# EAGLE board SaLAltimeter (EAGLE 7.5.0)
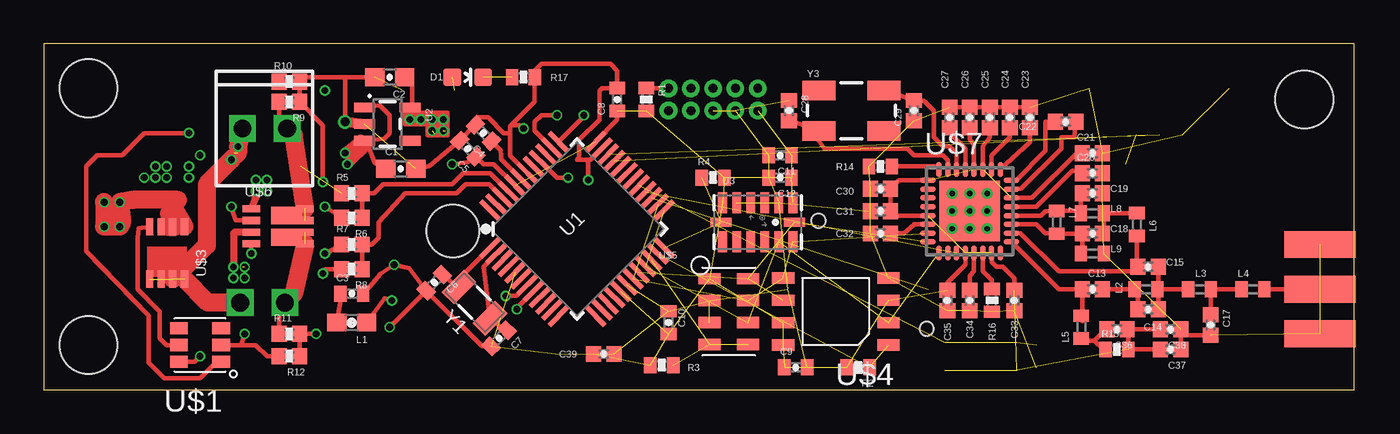
[diagram p0: board, top side]
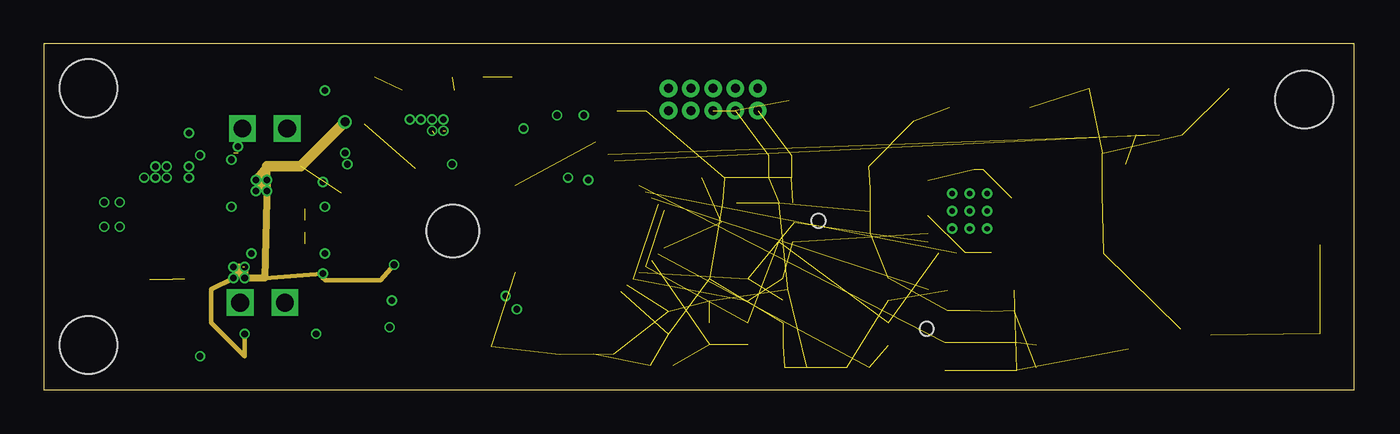
[diagram p1: board, inner layer Route2]
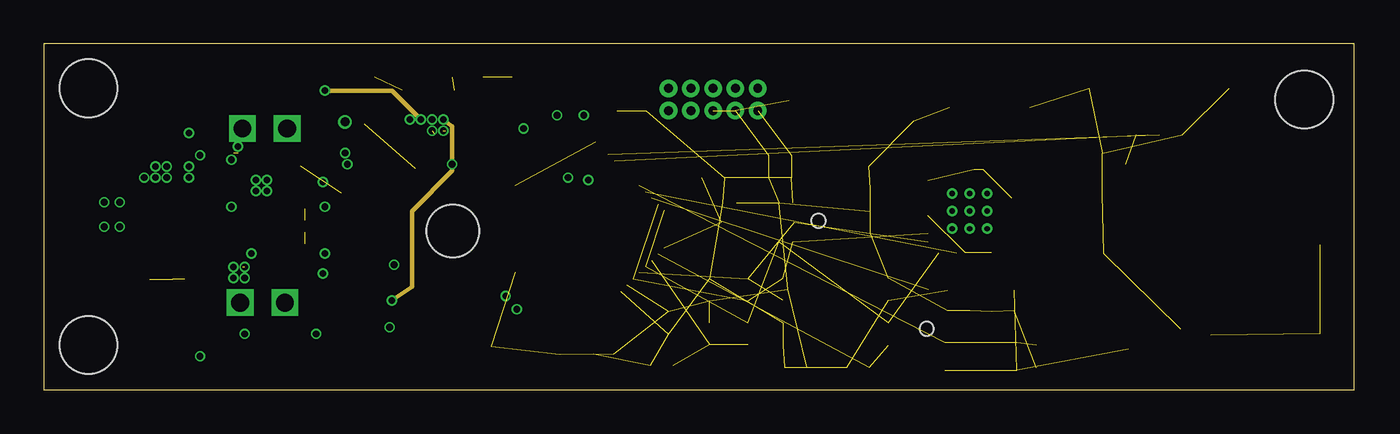
[diagram p2: board, inner layer Route15]
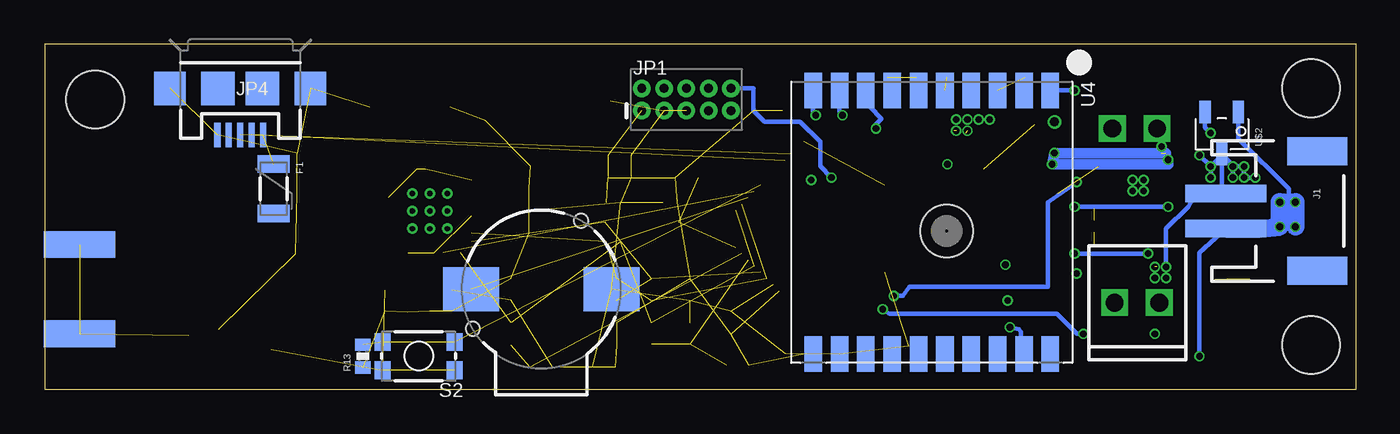
[diagram p3: board, bottom side, seen from below]

Size 74.6 x 19.68 mm. Coordinates in mm from the lower left corner, seen from the top.
Outline: 0,0 74.6,0 74.6,19.68 0,19.68 0,0
Copper layers (1*2*15*16): Top 0.035559375mm / dielectric 0.17018125mm / Route2 0.01778125mm / dielectric 47mil / Route15 0.01778125mm / dielectric 0.17018125mm / Bottom 0.035559375mm
Design rules "OSHPark-4layer-SaL *": minimum track width 5mil, minimum drill 10mil, track to track 8mil, track to pad 8mil, pad to pad 8mil, via to via 10mil, smd to smd 0mil, copper to edge 15mil, drill to drill 6mil, minimum pad ring 4mil, minimum via ring 4mil, stop-mask expansion 2.5mil, vias tented up to drill 0mil, thermal gap 10mil

## Footprints (pad centres in the part's own frame; a part is rotated, then mirrored left to right if it is on the bottom)
0603-CAP = smd 1.1 x 1: 1 -0.85,0; 2 0.85,0
0402-CAP = smd 0.7 x 0.9: 1 -0.65,0; 2 0.65,0
0402-CAP' = smd 0.85 x 0.9: 1 -0.58,0; 2 0.58,0
LED-0603 = smd 1 x 1: A 0,-0.877; C 0,0.877
PTC-1206 = smd 1 x 1.8: 1 -1.4,0; 2 1.4,0
JST-2-SMD = smd 1 x 4.6: 1 -1,-3.7; 2 1,-3.7 | smd 1.6 x 3.4: NC1 -3.4,1.5; NC2 3.4,1.5
SMA-EDGE = smd 1.524 x 4.064: GND@0 0,0; GND@1 5.08,0; SIG 2.54,0 | smd 1.524 x 4.064 bottom: GND@2 0,0; GND@3 5.08,0
2X5-PTH-1.27MM = drill 0.508 pad 1: 1 -2.54,-0.635; 2 -2.54,0.635; 3 -1.27,-0.635; 4 -1.27,0.635; 5 0,-0.635; 6 0,0.635; 7 1.27,-0.635; 8 1.27,0.635; 9 2.54,-0.635; 10 2.54,0.635
1X02_2.54_SCREWTERM = drill 1.016 square: P1 2.54,0; P2 0,0
USB-MICROB = smd 0.35 x 1.4: D+ 0,2.65; D- -0.65,2.65; GND 1.3,2.65; ID 0.65,2.65; VBUS -1.3,2.65 | smd 1.8 x 1.9: MT1 -4,0; MT2 4,0 | smd 1.9 x 1.9: P$1 -1.27,0; P$2 1.27,0
0603 = smd 1.1 x 1: 1 -0.85,0; 2 0.85,0
C0402 = smd 0.7 x 0.9: 1 -0.65,0; 2 0.65,0
0402-RES = smd 0.7 x 0.9: 1 -0.65,0; 2 0.65,0
0402-RES' = smd 0.85 x 0.9: 1 -0.58,0; 2 0.58,0
TACTILE_SWITCH_SMD_4.6X2.8MM = smd 0.9 x 1: 1 -2.05,-0.8; 2 2.05,-0.8; 3 2.05,0.8; 4 -2.05,0.8
BUZZER-CCV = smd 3.2 x 2.5: + 4,0; - -4,0 | hole 0.8: -3.9,-2.25; 2.25,3.9
STAND-OFF = hole 3.302: 0,0
TQFP-48 = smd 1.5 x 0.28: 1 -4.25,2.75; 2 -4.25,2.25; 3 -4.25,1.75; 4 -4.25,1.25; 5 -4.25,0.75; 6 -4.25,0.25; 7 -4.25,-0.25; 8 -4.25,-0.75; 9 -4.25,-1.25; 10 -4.25,-1.75; 11 -4.25,-2.25; 12 -4.25,-2.75; 25 4.25,-2.75; 26 4.25,-2.25; 27 4.25,-1.75; 28 4.25,-1.25; 29 4.25,-0.75; 30 4.25,-0.25; 31 4.25,0.25; 32 4.25,0.75; 33 4.25,1.25; 34 4.25,1.75; 35 4.25,2.25; 36 4.25,2.75 | smd 0.28 x 1.5: 13 -2.75,-4.25; 14 -2.25,-4.25; 15 -1.75,-4.25; 16 -1.25,-4.25; 17 -0.75,-4.25; 18 -0.25,-4.25; 19 0.25,-4.25; 20 0.75,-4.25; 21 1.25,-4.25; 22 1.75,-4.25; 23 2.25,-4.25; 24 2.75,-4.25; 37 2.75,4.25; 38 2.25,4.25; 39 1.75,4.25; 40 1.25,4.25; 41 0.75,4.25; 42 0.25,4.25; 43 -0.25,4.25; 44 -0.75,4.25; 45 -1.25,4.25; 46 -1.75,4.25; 47 -2.25,4.25; 48 -2.75,4.25
SOT23-5 = smd 0.55 x 1.2: 1 -0.95,-1.3; 2 0,-1.3; 3 0.95,-1.3; 4 0.95,1.3; 5 -0.95,1.3
LGA14 = smd 0.5 x 1.2: 1 2,1.1; 2 1.2,1.1; 3 0.4,1.1; 4 -0.4,1.1; 5 -1.2,1.1; 6 -2,1.1; 8 -2,-1.1; 9 -1.2,-1.1; 10 -0.4,-1.1; 11 0.4,-1.1; 12 1.2,-1.1; 13 2,-1.1 | smd 1.2 x 0.5: 7 -2.1,0; 14 2.1,0
FGPMMOPA6H = smd 2 x 1: P$1 -7.5,6.75; P$2 -7.5,5.25; P$3 -7.5,3.75; P$4 -7.5,2.25; P$5 -7.5,0.75; P$6 -7.5,-0.75; P$7 -7.5,-2.25; P$8 -7.5,-3.75; P$9 -7.5,-5.25; P$10 -7.5,-6.75; P$11 7.5,-6.75; P$12 7.5,-5.25; P$13 7.5,-3.75; P$14 7.5,-2.25; P$15 7.5,-0.75; P$16 7.5,0.75; P$17 7.5,2.25; P$18 7.5,3.75; P$19 7.5,5.25; P$20 7.5,6.75 | hole 3: 0.5,0.85
MAX16054 = smd 1 x 0.7: !OUT 1.2,-0.95; CLR -1.2,-0.95; GND -1.2,0; IN -1.2,0.95; OUT 1.2,0; VCC 1.2,0.95
SS345PT = smd 1.27 x 0.635: GND 1.2,0; OUT -1.2,-0.95; VCC -1.2,0.95
SI7615ADN = smd 0.99 x 0.405: D1 2.985,0; D2 2.985,-0.66; D3 2.985,-1.32; D4 2.985,-1.98; G 0,-1.98; S1 0,0; S2 0,-0.66; S3 0,-1.32
AT25SF081 = smd 1.27 x 0.635: !CS -3,2.54; !HOLD 3,1.27; !WP -3,0; GND -3,-1.27; SCK 3,0; SI 3,-1.27; SO -3,1.27; VCC 3,2.54
MS5607 = smd 1.27 x 0.635: 1 -1.1,1.875; 2 -1.1,0.625; 3 -1.1,-0.625; 4 -1.1,-1.875; 5 1.1,-1.875; 6 1.1,-0.625; 7 1.1,0.625; 8 1.1,1.875
SI7232DN = smd 0.991 x 0.406: 1 0,0; 2 0,-0.66; 3 0,-1.321; 4 0,-1.981; 5 3.048,-1.981; 6 3.048,-1.321; 7 3.048,-0.66; 8 3.048,0 | smd 1.727 x 0.991: P$9 1.994,-0.368; P$10 1.994,-1.615
CC1120 = smd 0.85 x 0.3: 1 -2.375,1.75; 2 -2.375,1.25; 3 -2.375,0.75; 4 -2.375,0.25; 5 -2.375,-0.25; 6 -2.375,-0.75; 7 -2.375,-1.25; 8 -2.375,-1.75; 17 2.375,-1.75; 18 2.375,-1.25; 19 2.375,-0.75; 20 2.375,-0.25; 21 2.375,0.25; 22 2.375,0.75; 23 2.375,1.25; 24 2.375,1.75 | smd 0.3 x 0.85: 9 -1.75,-2.375; 10 -1.25,-2.375; 11 -0.75,-2.375; 12 -0.25,-2.375; 13 0.25,-2.375; 14 0.75,-2.375; 15 1.25,-2.375; 16 1.75,-2.375; 25 1.75,2.375; 26 1.25,2.375; 27 0.75,2.375; 28 0.25,2.375; 29 -0.25,2.375; 30 -0.75,2.375; 31 -1.25,2.375; 32 -1.75,2.375 | smd 3.45 x 3.45: EXP 0,0 | drill 0.3 pad 0.6: EXP@1 -1,1; EXP@2 0,1; EXP@3 1,1; EXP@4 -1,0; EXP@5 0,0; EXP@6 1,0; EXP@7 -1,-1; EXP@8 0,-1; EXP@9 1,-1
CRYSTAL-SMD-3.2X1.5MM = smd 1 x 1.8: P$1 -1.25,0; P$2 1.25,0
CRYSTAL-SMD-5X3 = smd 1.9 x 1.1: 1 -1.85,-1.15; 2 1.85,-1.15; 3 1.85,1.15; 4 -1.85,1.15

## Placement (x,y rotation side)
C1  1.0uF  [0603-CAP]  20.32,12.57 0 top
C2  2.2uF  [0603-CAP]  19.69,17.78 180 top
C3  0.1uF  [0402-CAP]  17.53,5.46 0 top
C4  0.1uF  [0402-CAP]  25.02,14.61 135 top
C5  0.1uF  [0402-CAP]  24.13,13.72 135 top
C6  15pF  [0402-CAP]  22.23,6.1 225 top
C7  15pF  [0402-CAP]  25.91,2.92 225 top
C8  [0402-CAP]  32.64,16.51 90 top
C9  0.1uF  [0402-CAP]  42.8,1.27 0 top
C10  0.1uF  [0402-CAP]  35.56,3.81 90 top
C11  0.1uF  [0402-CAP]  41.91,13.34 180 top
C12  10uF  [0402-CAP]  41.91,12.06 180 top
C13  39pF  [0402-CAP']  59.69,5.71 0 top
C14  2.2pF  [0402-CAP']  62.87,4.57 0 top
C15  5.1pF  [0402-CAP']  62.87,6.99 180 top
C17  6.2pF  [0402-CAP']  66.42,3.68 270 top
C18  5.1pF  [0402-CAP']  59.69,8.89 0 top
C19  5.1pF  [0402-CAP']  59.69,11.18 0 top
C20  10nF  [0402-CAP']  59.69,12.32 0 top
C21  47nF  [0402-CAP']  59.69,13.46 0 top
C22  1.8nF  [0402-CAP']  58.17,15.24 0 top
C23  47nF  [0402-CAP']  56.13,15.49 270 top
C24  47nF  [0402-CAP']  54.99,15.49 270 top
C25  47nF  [0402-CAP']  53.85,15.49 270 top
C26  47nF  [0402-CAP']  52.7,15.49 270 top
C27  47nF  [0402-CAP']  51.56,15.49 270 top
C28  15pF  [0402-CAP']  42.42,15.88 270 top
C29  15pF  [0402-CAP']  49.53,15.88 90 top
C30  47nF  [0402-CAP']  47.62,11.43 0 top
C31  47nF  [0402-CAP']  47.62,10.16 0 top
C32  220nF  [0402-CAP']  47.62,8.89 0 top
C33  47nF  [0402-CAP']  55.24,5.08 90 top
C34  47nF  [0402-CAP']  52.7,5.08 90 top
C35  47nF  [0402-CAP']  51.44,5.08 90 top
C36  56pF  [0402-CAP']  61.09,3.43 180 top
C37  10nF  [0402-CAP']  64.13,2.29 180 top
C38  100pF  [0402-CAP']  64.13,3.43 180 top
C39  0.1uF  [0402-CAP']  31.88,2.03 180 top
D1  RED  [LED-0603]  24.13,17.78 270 top
F1  PTCSMD  [PTC-1206]  61.59,11.43 270 bottom
FRAME1  FRAME-LEDGER  [CREATIVE_COMMONS]  -0.63,23.5 0 top  (outside the outline)
J1  [JST-2-SMD]  3.68,10.16 270 bottom
J$1  SMA_EDGE  [SMA-EDGE]  72.64,3.17 90 top
JP1  CORTEX_DEBUGPTH  [2X5-PTH-1.27MM]  38.1,16.51 0 bottom
JP2  [1X02_2.54_SCREWTERM]  11.3,14.86 0 top
JP3  [1X02_2.54_SCREWTERM]  11.18,4.95 180 bottom
JP4  USB-MICROB  [USB-MICROB]  63.5,17.14 180 bottom
L1  FB - 30Ohm  [0603]  17.53,3.81 180 top
L2  15nH  [C0402]  62.74,5.71 0 top
L3  43nH  [C0402]  65.79,5.71 0 top
L4  22nH  [C0402]  68.83,5.71 0 top
L5  56nH  [C0402]  59.05,3.56 90 top
L6  15nH  [C0402]  62.23,9.4 270 top
L7  56nH  [C0402]  57.66,9.53 270 top
L8  27nH  [C0402]  59.69,10.03 0 top
L9  27nH  [C0402]  59.69,7.75 0 top
R1  [0402-RES]  34.29,16.51 270 top
R2  [0402-RES]  46.35,1.27 180 top
R3  [0402-RES]  35.18,1.4 180 top
R4  [0402-RES]  38.1,12.06 0 top
R5  10kohm  [0402-RES']  17.53,11.18 0 top
R6  10kohm  [0402-RES']  17.53,9.78 180 top
R7  10kohm  [0402-RES']  17.53,8.26 0 top
R8  10kohm  [0402-RES']  17.53,6.86 180 top
R9  10kohm  [0402-RES']  13.97,16.38 180 top
R10  10kohm  [0402-RES']  13.97,17.53 0 top
R11  10kohm  [0402-RES']  13.97,3.17 0 top
R12  10kohm  [0402-RES']  13.97,1.91 180 top
R13  [0402-RES]  56.52,1.91 90 bottom
R14  0ohm  [0402-RES]  47.62,12.7 180 top
R15  [0402-RES]  61.09,2.29 0 top
R16  56KOhm  [0402-RES]  53.98,5.08 270 top
R17  301ohm\  [0402-RES]  27.3,17.78 180 top
S2  SWITCH-MOMENTARY-2SMD-4.6X2.8MM  [TACTILE_SWITCH_SMD_4.6X2.8MM]  53.34,1.91 180 bottom
SG1  BUZZERSMD2  [BUZZER-CCV]  46.35,5.71 0 bottom
STANDOFF1  STAND-OFF  [STAND-OFF]  71.75,16.51 0 top
STANDOFF2  STAND-OFF  [STAND-OFF]  2.54,17.14 0 top
STANDOFF3  STAND-OFF  [STAND-OFF]  2.54,2.54 0 top
U1  ATSAMD21G-A  [TQFP-48]  30.35,9.14 45 top
U2  V_REG_LDOSMD  [SOT23-5]  19.56,15.11 270 top
U3  ADXL345  [LGA14]  40.64,9.53 0 top
U4  [FGPMMOPA6H]  24.13,9.53 270 bottom
U$1  MAX16054  [MAX16054]  8.89,2.54 180 top
U$2  SS345PT  [SS345PT]  7.62,14.61 270 bottom
U$3  SI7615ADN  [SI7615ADN]  8,9.27 270 top
U$4  AT25SF081  [AT25SF081]  45.09,5.08 180 top
U$5  SIMPLE-MS5607  [MS5607]  38.99,4.45 0 top
U$6  SI7232DN  [SI7232DN]  11.81,10.29 0 top
U$7  CC1120  [CC1120]  52.7,10.16 0 top
Y1  [CRYSTAL-SMD-3.2X1.5MM]  24.51,4.95 135 top
Y3  32MHz  [CRYSTAL-SMD-5X3]  45.97,15.88 0 top

## Library data of the parts
C1 C2 C13-C15 C17-C39 = SparkFun-Capacitors
C3-C12 L1-L9 R1-R4 R13-R17 = SparkFun-Passives
D1 = SparkFun-LED; PROD_ID: DIO-00819
F1 = SparkFun-PowerIC; PROD_ID: RES-11150
FRAME1 = SparkFun-Aesthetics
J1 = SparkFun-Connectors; BTM_NEG: -; BTM_POS: +; PROD_ID: CONN-11443; TOP_NEG: -; TOP_POS: +
J$1 JP1-JP3 = SparkFun-Connectors
JP4 = SparkFun-Connectors; PROD_ID: CONN-09505
R5-R12 = SparkFun-Resistors
S2 = SparkFun-Electromechanical; PROD_ID: SWCH-13065
SG1 STANDOFF1-STANDOFF3 = SparkFun-Electromechanical
U1 = SparkFun-DigitalIC; PROD_ID: IC-13064
U2 = SparkFun-PowerIC
U3 = SparkFun-Sensors
U4 = adafruit
U$1-U$4 U$6 U$7 = SaL-lib
U$5 = MS5607
Y1 = SparkFun-FreqCtrl
Y3 = SparkFun-FreqCtrl; PROD_ID: XTAL-08218

## Nets
3.3V: C2.1 C5.1 C8.1 C9.1 C10.1 C11.1 C12.1 C21.1 C25.2 C26.2 C30.2 C31.2 C33.2 C34.2 C35.2 C36.1 C37.2 C38.2 C39.2 JP1.1 L1.1 R1.2 R2.2 R3.2 R4.2 R15.2 S2.3 S2.4 U1.17 U1.36 U1.44 U2.5 U3.1 U3.6 U4.P$1 U$4.!HOLD U$4.!WP U$4.VCC U$5.1 U$7.1 U$7.5 U$7.12 U$7.13 U$7.15 U$7.22 U$7.27 U$7.28
!RESET: JP1.10 R1.1 U1.40
BUZZER: SG1.- U1.27
CS_ACCEL: R4.1 U1.24 U3.7
CS_BARO: R3.1 U1.22 U$5.4 U$5.5
CS_MEM: R2.1 U1.23 U$4.!CS
CS_TX: U1.28 U$7.11
FET_A: JP2.P1 R9.2 U$6.7 U$6.8
FET_B: JP3.P1 R11.1 U$6.5 U$6.6
FIRE_A: R5.2 R6.1 U1.45
FIRE_B: R7.2 R8.1 U1.46
GATE: U$1.OUT U$3.G
GND: C1.2 C2.2 C3.2 C4.2 C5.2 C6.2 C7.2 C8.2 C9.2 C10.2 C11.2 C12.2 C17.2 C19.2 C20.2 C21.2 C23.1 C24.1 C25.1 C26.1 C27.1 C28.1 C29.1 C30.1 C31.1 C32.1 C33.1 C34.1 C35.1 C37.1 C38.1 C39.1 J1.1 J$1.GND@0 J$1.GND@1 J$1.GND@2 J$1.GND@3 JP1.3 JP1.5 JP4.GND JP4.MT1 JP4.MT2 L9.2 R5.1 R8.2 R10.1 R12.2 R13.1 R14.2 R16.2 R17.1 SG1.+ U1.5 U1.18 U1.35 U1.42 U2.2 U3.2 U3.4 U3.5 U4.P$3 U4.P$8 U4.P$12 U4.P$19 U$1.GND U$2.GND U$4.GND U$5.2 U$5.3 U$6.1 U$6.3
GPS_RX: U1.38 U4.P$9
GPS_TX: U1.37 U4.P$10
LVD_IN: C1.1 JP2.P2 JP3.P2 U2.1 U2.3 U$3.D1 U$3.D2 U$3.D3 U$3.D4
N$1: R6.2 U$6.2
N$2: U$1.IN U$2.OUT
N$3: C6.1 U1.1 Y1.P$2
N$4: C7.1 U1.2 Y1.P$1
N$5: C3.1 L1.2
N$6: C4.1 U1.43
N$7: U1.6
N$8: R7.1 U$6.4
N$9: C13.1 L5.2 U$7.17
N$10: C13.2 C14.1 L2.1
N$11: C14.2 C15.1 L2.2 L3.1
N$12: C17.1 L3.2 L4.1
N$13: J$1.SIG L4.2
N$14: F1.1 JP4.VBUS
N$15: C23.2 U$7.25
N$16: C15.2 L6.2 U$7.18
N$17: C18.1 L7.2 L9.1 U$7.19
N$18: C18.2 L6.1 L8.2
N$19: C19.1 L7.1 L8.1 U$7.20
N$20: C22.1 U$7.24
N$21: C22.2 U$7.23
N$22: C20.1 U$7.21
N$23: C24.2 U$7.26
N$24: R16.1 U$7.14
N$25: R14.1 U$7.32
N$26: C27.2 U$7.29
N$27: C29.2 U$7.30 Y3.3
N$28: C28.2 U$7.31 Y3.1
N$30: D1.C R17.2
N$31: D1.A U4.P$5
N$34: C32.2 U$7.6
N$38: C36.2 L5.1 R15.1
PROG: R13.2 S2.1 S2.2 U1.29
RAW: J1.2 U$1.VCC U$2.VCC U$3.S1 U$3.S2 U$3.S3
SENSE_A: R9.1 R10.2 U1.7
SENSE_B: R11.2 R12.1 U1.8
SENSE_BAT: U1.9
SPI_MISO: U1.21 U1.25 U3.12 U$4.SO U$5.6 U$7.9
SPI_MOSI: U1.19 U1.26 U3.13 U$4.SI U$5.7 U$7.7
SPI_SCK: U1.20 U3.14 U$4.SCK U$5.8 U$7.8
SWCLK: JP1.4
SWDIO: JP1.2
USB_D+: JP4.D+ U1.34
USB_D-: JP4.D- U1.33

## Tracks (layer width: path | path; a pad name or v marks a point on that pad's centre or on a via)
3.3V  (via drill 0.38)  (30 unrouted)
  Top 0.254: U$7.22 56.25,10.91 58.8,13.46 C21.1 | C25.2 53.85,14.35 53.47,13.84 53.47,12.55 U$7.27 | C26.2 52.7,14.22 52.96,13.97 U$7.28 | U$7.5 48.45,9.91 C31.2 C30.2 48.69,11.91 U$7.1 | U$7.15 53.98,7.76 53.98,7.24 54.23,6.99 54.61,6.99 55.24,6.35 C33.2 | U$7.13 52.96,6.73 52.7,6.48 C34.2 | U$7.12 52.45,7.11 51.44,6.1 C35.2 | C37.2 R15.2 61.74,3.36 C36.1 C38.2 | C8.1 32.64,15.37 32,14.73 32,14.68 U1.36 | U1.44 25.61,12.83 25.02,12.83 24.97,12.88 C5.1 24.46,13.29 24.13,12.95 v23.24,12.83 | L1.1 19.39,5.21 v19.81,5.08 | 21.97,15.37 v21.46,15.37 v20.83,15.37 20.83,16.03 U2.5 20.96,16.06 20.96,17.78 C2.1 | 21.97,15.37 v22.1,15.37 v22.73,15.37 | 21.97,15.37 21.97,14.48 | 21.97,14.48 22.99,14.48 22.99,15.11 | 22.99,15.49 22.73,15.49 | 22.73,15.49 21.08,15.49 21.08,16 20.7,16 20.7,15.24 22.73,15.24 22.86,15.37 22.86,15.75 | 22.86,15.75 21.34,15.75 21.21,15.62 21.21,15.88 21.34,16 20.57,16 20.57,15.24 | 20.57,15.24 20.7,15.11 | 20.7,15.11 22.99,15.11 | 22.99,15.11 22.99,15.49 | 22.99,15.49 22.99,15.75 22.86,15.75 | 22.73,15.49 22.73,14.86 22.86,14.73 22.35,14.73 22.23,14.61 22.23,14.99 22.48,14.99 22.61,14.86 21.97,14.86 21.84,14.99 21.84,14.48 21.97,14.48 | 20.57,15.24 20.57,15.11 20.7,15.11
  Route15 0.254: v19.81,5.08 20.96,5.84 20.96,10.16 23.24,12.45 v23.24,12.83 23.24,14.99 v22.73,15.37 | v16,17.02 19.81,17.02 v21.46,15.37
  Bottom 0.254: U4.P$1 v16.01,17.02 v16,17.02
  other vias: 22.1,14.73 22.73,14.73
!RESET  (via drill 0.38)
  Top 0.254: R1.1 34.3,17.14 JP1.10 | U1.40 29.2,12.06 v29.84,12.06
  Bottom 0.254: v29.84,12.06 30.48,12.7 30.48,14.1 31.62,15.24 33.66,15.24 34.29,15.88 R1.1 34.3,17.14 JP1.10
BUZZER  (1 unrouted)
CS_ACCEL  (2 unrouted)
CS_BARO  (3 unrouted)
CS_MEM  (2 unrouted)
CS_TX  (1 unrouted)
FET_A  (1 unrouted)
  Top 0.254: JP2.P1 13.39,15.31 R9.2
  Top 1.016: U$6.8 14.22,14.48 JP2.P1
FET_B  (1 unrouted)
  Top 0.254: R11.1 13.39,4.63 JP3.P1
  Top 1.016: U$6.5 14.22,5.46 JP3.P1
FIRE_A
  Top 0.254: R6.1 R5.2 18.8,11.18 19.3,11.68 23.24,11.68 23.88,12.32 25.41,12.32 U1.45
FIRE_B
  Top 0.254: R8.1 R7.2 18.67,8.26 19.05,8.64 19.05,9.53 20.57,11.18 23.5,11.18 24,11.68 25.34,11.68 U1.46
GATE
  Top 0.254: U$1.OUT 6.99,2.54 6.6,2.92 6.6,4.45 5.33,5.71 5.33,8.64 5.39,9.2 U$3.G
GND  (via drill 0.38, 0.51)  (45 unrouted)
  Top 0.254: C27.1 C26.1 C25.1 C24.1 C23.1 | C37.1 C38.1 65.04,3.1 C17.2 | v11.43,3.17 11.23,2.54 | U$1.GND 11.23,2.54 | 11.23,2.54 12.07,2.54 12.7,1.91 R12.2 | v15.88,6.6 16,6.86 R8.2 | C3.2 18.56,5.84 19.18,6.6 v19.94,7.11 20.78,6.91 C6.2 | C6.2 24.94,2.46 C7.2 | C1.2 21.94,12.7 C5.2 C4.2 24.73,15.49 25.27,15.49 26.16,14.61 26.54,14.61 | U1.42 26.54,13.31 26.54,14.61 | C2.2 17.14,17.78 | 17.14,17.78 v17.14,15.24 | 26.61,15.05 27.94,16.38 27.94,17.77 R17.1 27.96,18.18 28.32,18.54 32.26,18.54 32.64,18.16 C8.2 31.77,17.16 31.62,17.02 31.62,15.37 30.48,14.22 30.48,13.21 30.35,13.08 30.99,13.08 | 26.61,15.05 26.54,14.99 26.54,14.61 | v27.3,14.86 27.11,15.05 26.61,15.05 | U1.35 31.11,13.08 30.99,13.08 | 30.99,13.08 v30.99,11.94 | v19.69,3.56 C6.2 | R10.1 13.64,17.78 17.14,17.78
  Top 0.406: U$6.1 12.07,10.92 v12.07,11.3 | U$6.3 10.87,8.97 10.79,8.89 v10.79,6.99
  Top 0.61: U2.2 v17.14,15.24
  Route2 0.254: v10.79,6.35 9.53,5.71 9.53,3.81 11.43,1.91 v11.43,3.17 | 12.57,6.35 v15.88,6.6 15.88,6.35 16,6.22 19.18,6.22 v19.94,7.11
  Route2 0.406: v12.07,11.3 v12.7,11.94 | v12.7,11.94 12.7,12.7 v12.07,11.94 v12.7,11.94 | v10.79,6.99 11.3,6.99 v10.79,6.35 | v11.43,6.99 v11.43,6.35 12.57,6.35 v12.7,11.94 | v12.7,11.94 v12.7,11.3
  Route2 0.61: v17.14,15.24 14.61,12.7 12.7,12.7
  Bottom 0.254: U$2.GND 7.62,11.27 | 7.62,11.27 J1.1 | 7.62,11.27 9.05,11.27 9.53,10.41 10.79,9.14 v10.79,6.99 | v5.71,12.06 v6.35,12.06 v6.35,12.7 v6.99,12.7 | v6.99,12.7 v6.99,12.06 | v6.99,12.7 6.99,12.77 U$2.GND | U$2.GND 7.62,13.34 v8.26,12.7 | v8.26,12.7 v8.89,13.34 | v8.26,12.7 v8.26,12.06 | U4.P$8 27.62,16.77 27.62,16.07 26.99,15.43 27.3,15.11 v27.3,14.86 | U4.P$19 19.05,2.19 19.05,3.3 19.18,3.43 v19.69,3.56
GPS_RX  (via drill 0.38)
  Top 0.254: U1.38 27.94,14.74 27.94,15.24 28.32,15.62 v29.21,15.62
  Bottom 0.254: v29.21,15.62 29.38,15.79 U4.P$9
GPS_TX  (via drill 0.38)
  Top 0.254: U1.37 30.73,15.54 v30.73,15.62
  Bottom 0.254: v30.73,15.62 30.88,15.77 U4.P$10
LVD_IN  (via drill 0.38)  (4 unrouted)
  Top 0.254: C1.1 18.84,12.91 18.41,13.97 18.41,14.26 U2.3 19.37,14.29 19.69,14.61 19.69,15.62 19.12,16.19 U2.1
  Top 0.61: v17.27,12.83 18.41,13.97 | v17.14,13.46 17.78,13.97 18.03,14.22
  Top 1.016: JP3.P2 9.33,4.95 U$3.D1 | JP2.P2 v11.05,13.84 11.05,13.46 v10.67,13.08 9.27,11.68 9.27,8.22 U$3.D2
  Bottom 0.61: 10.79,13.46 v17.14,13.46 v17.27,12.83 10.67,12.83
N$1  (via drill 0.38)
  Top 0.254: U$6.2 11.18,9.65 10.92,9.65 v10.67,10.41 | v16,10.41 R6.2
  Bottom 0.254: v10.67,10.41 v16,10.41
N$2  (via drill 0.38)
  Top 0.254: v8.26,14.61 5.71,14.61 4.45,13.34 3.05,13.34 2.41,12.7 2.41,7.87 5.97,4.19 5.97,1.52 6.86,0.64 8.89,0.64 9.85,1.59 U$1.IN
  Bottom 0.254: U$2.OUT 8.57,14.92 v8.26,14.61
N$3
  Top 0.254: U1.1 23.64,6.32 Y1.P$2 23.64,5.71 C6.1
N$4
  Top 0.254: U1.2 25.02,6.99 Y1.P$1 | 24.77,3.81 Y1.P$1 | Y1.P$1 26.16,3.44 C7.1
N$5
  Top 0.254: L1.2 16.93,5.26 C3.1
N$6
  Top 0.254: U1.43 26.04,13.11 26.04,13.34 25.99,13.64 C4.1
N$8  (via drill 0.38)
  Top 0.254: U$6.4 v11.81,7.75 | v16,7.75 R7.1
  Bottom 0.254: v11.81,7.75 v16,7.75
N$9
  Top 0.254: U$7.17 55.09,8.41 57.79,5.71 C13.1 59.11,3.88 L5.2
N$10
  Top 0.254: C14.1 62.29,5.64 L2.1 C13.2
N$11
  Top 0.254: C15.1 63.45,5.79 L2.2 | L2.2 L3.1 | C14.2 63.45,5.64 L2.2
N$12
  Top 0.254: C17.1 66.44,4.5 L3.2 L4.1
N$13
  Top 0.254: L4.2 J$1.SIG
N$14  (1 unrouted)
N$15
  Top 0.254: U$7.25 56.13,14.09 C23.2
N$16
  Top 0.254: L6.2 62.23,7.04 C15.2 62.03,6.73 57.79,6.73 55.61,8.91 U$7.18
N$17
  Top 0.254: U$7.19 56.5,9.41 57.02,8.89 57.13,8.89 L7.2 59.09,8.88 C18.1 59.11,7.69 L9.1
N$18
  Top 0.254: C18.2 60.34,8.96 L8.2 62.09,10.03 L6.1
N$19
  Top 0.254: U$7.20 56.77,9.91 57.02,10.16 57.13,10.16 L7.1 59.02,10.18 L8.1 59.04,11.36 C19.1
N$20
  Top 0.254: U$7.24 55.33,11.9 57.02,13.59 57.02,15.24 C22.1
N$21
  Top 0.254: U$7.23 55.1,11.43 55.63,11.43 57.91,13.72 57.91,14.35 58.67,14.35 C22.2
N$22
  Top 0.254: U$7.21 56.51,10.41 58.55,12.45 58.86,12.45 C20.1
N$23
  Top 0.254: U$7.26 53.95,13.31 54.99,14.35 C24.2
N$24
  Top 0.254: U$7.14 53.47,7.77 53.47,6.73 53.98,6.22 R16.1
N$25
  Top 0.254: U$7.32 50.79,12.7 R14.1
N$26
  Top 0.254: C27.2 51.69,14.48 52.45,13.72 U$7.29
N$27
  Top 0.254: U$7.30 51.95,13.45 51.56,13.84 51.18,13.84 50.67,14.35 50.67,15.88 50.09,16.45 C29.2 47.69,17.15 Y3.3
N$28
  Top 0.254: C28.2 42.54,15.29 Y3.1 43.7,14.72 44.45,13.72 49.15,13.72 49.53,13.34 51.18,13.34 51.45,13.06 U$7.31
N$30  (1 unrouted)
N$31  (1 unrouted)
N$34
  Top 0.254: C32.2 48.97,8.89 49.53,9.4 49.54,9.41 U$7.6
N$38
  Top 0.254: L5.1 59.17,2.79 59.82,2.79 | 59.82,2.79 60.45,3.43 C36.2 | 59.82,2.79 60.33,2.29 R15.1
PROG  (3 unrouted)
RAW  (via drill 0.38)
  Top 0.254: U$3.S3 6.99,9.27 U$3.S2 7.49,9.27 U$3.S1 | U$1.VCC 8.57,1.59 v8.89,1.91
  Top 1.016: U$3.S1 7.37,10.41 7.62,10.79 5.08,10.79 v4.32,10.67 4.45,9.53 v4.32,9.27 v3.43,9.27 | v3.43,9.27 3.94,9.4 v3.43,10.67 v3.43,9.27 | 6.99,9.27 7.49,9.27 7.49,9.65 7.11,10.03
  Bottom 0.254: v8.89,1.91 8.89,7.78 J1.2 | U$2.VCC 6.67,14.29 3.81,11.43 3.81,10.67
  Bottom 1.016: J1.2 5.45,9.16 v4.32,9.27 v4.32,10.67 3.81,10.67 v3.43,10.67 v3.43,9.27
SENSE_A  (via drill 0.38)
  Top 0.254: U1.7 26.9,5.33 v26.29,5.33 | v15.88,11.81 15.88,15.06 R9.1 R10.2
  Bottom 0.254: v26.29,5.33 25.78,5.33 25.4,5.84 17.53,5.84 17.53,10.67 v15.88,11.81
SENSE_B  (via drill 0.38)
  Top 0.254: R12.1 R11.2 v15.49,3.17 | v26.92,4.57 26.97,4.7 U1.8
  Bottom 0.254: v15.49,3.17 15.88,3.17 17.02,4.32 26.54,4.32 v26.92,4.57
SPI_MISO  (5 unrouted)
SPI_MOSI  (5 unrouted)
SPI_SCK  (4 unrouted)
USB_D+  (1 unrouted)
USB_D-  (1 unrouted)